# Altium PCB DAQ-1-A.PcbDoc (part 1 of 2)
Units mil, origin at the board's own origin, x right, y up, seen from the top; angles counter-clockwise.
Board outline 1653.54 x 4488.19 mil, 2 copper layers (Top Layer, Bottom Layer); 58 components, 45 nets, 204 pads, 105 vias.
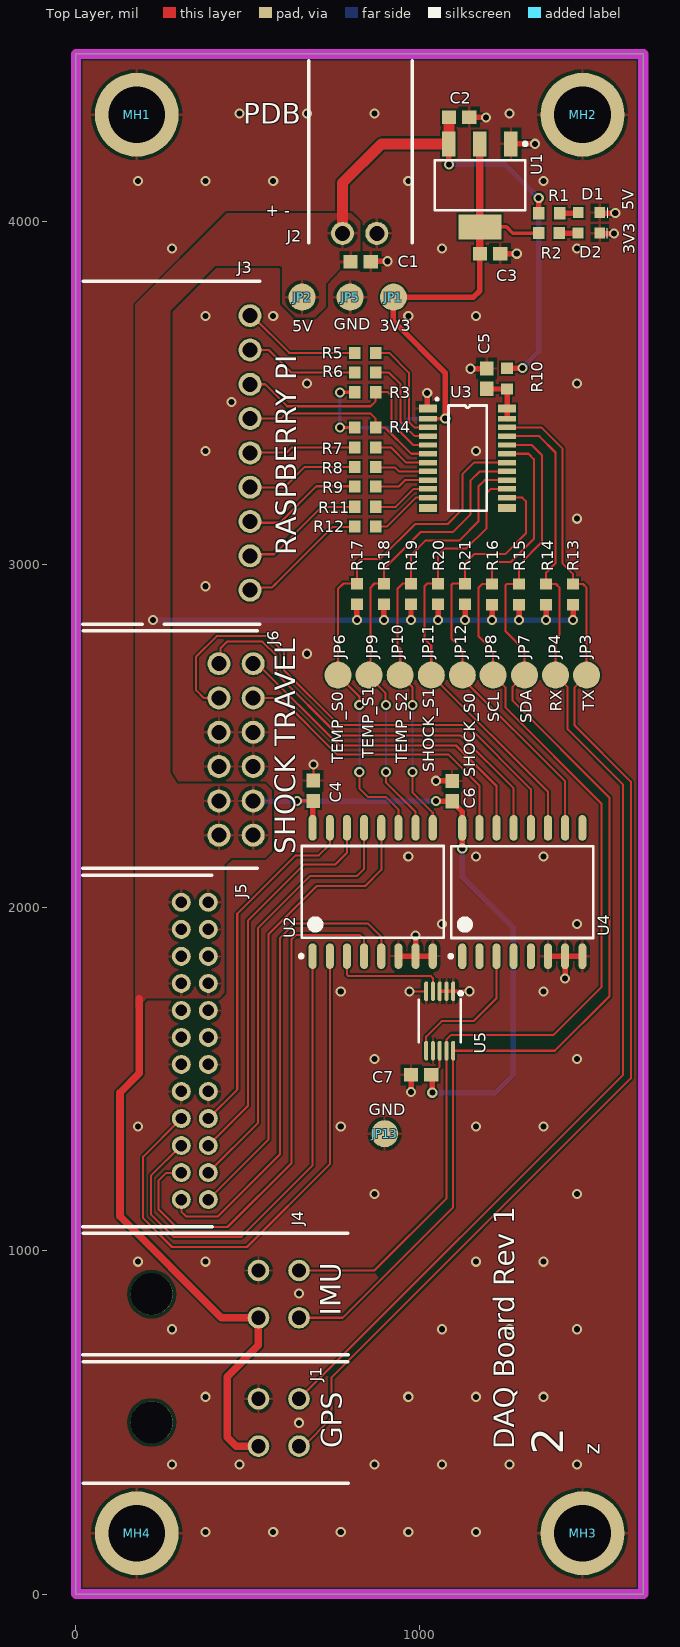
[diagram p0: Top Layer view]
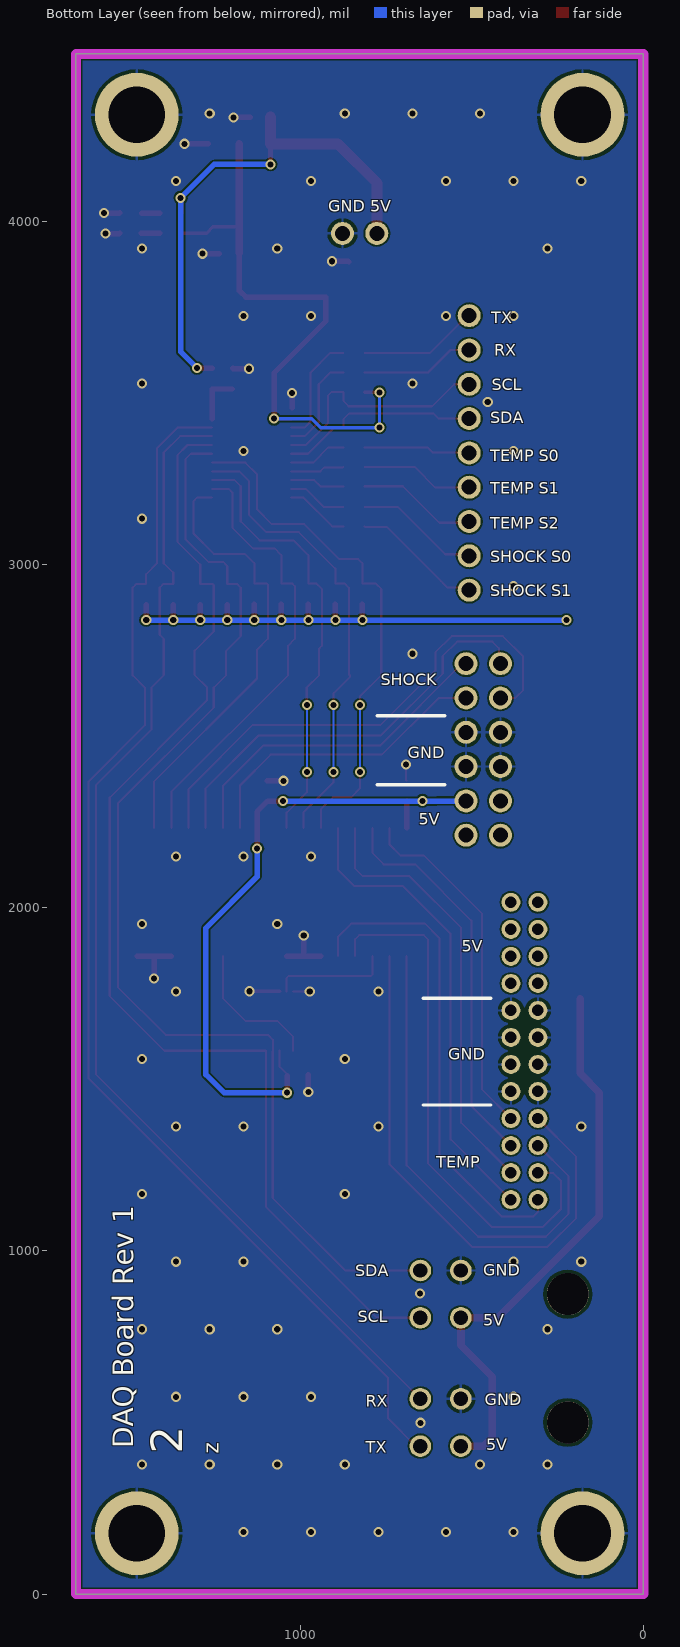
[diagram p1: Bottom Layer view, seen from below]
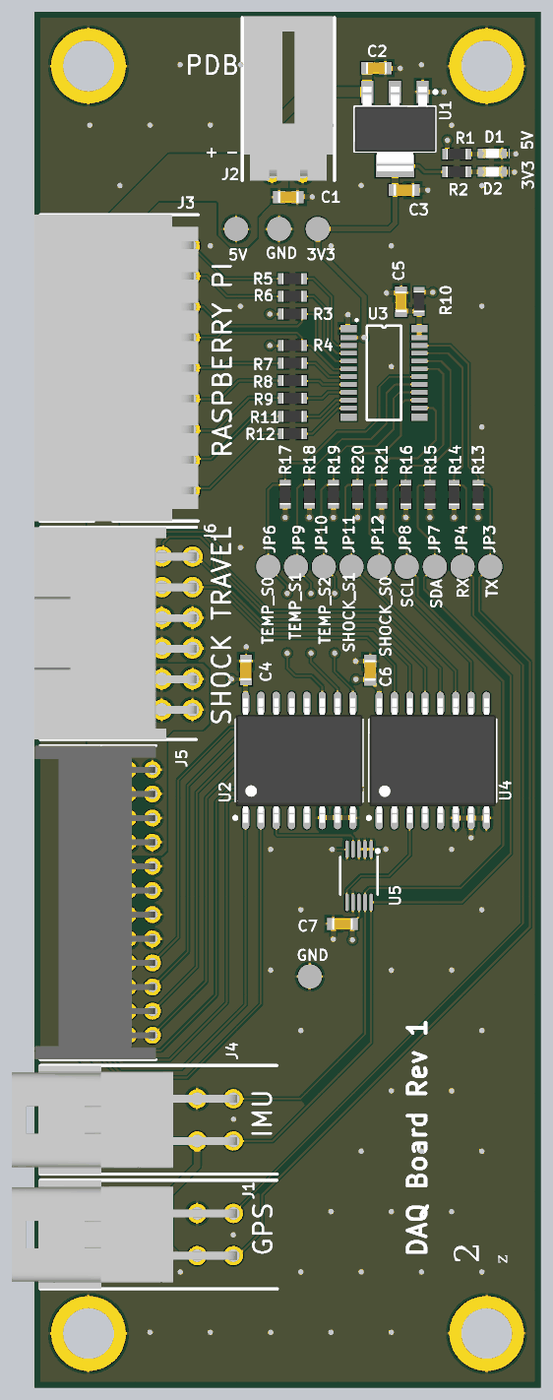
[diagram p2: 3D render of the assembled board from above, using the file's embedded part models]

## Layer stack, top to bottom
Top Solder: solder mask 0.4, Solder Resist, Dk 3.5
Top Layer: signal copper 1.4
Dielectric 1: dielectric 12.6, FR-4, Dk 4.8
Bottom Layer: signal copper 1.4
Bottom Solder: solder mask 0.4, Solder Resist, Dk 3.5

## Board outline
0,0 1653.54,0 1653.54,4488.19 0,4488.19

## Design rules (kind name [scope] priority, off if disabled: settings)
BoardOutlineClearance [All] p1: gap=7.87 ignorepadtopadclearanceinfootprint=FALSE
Clearance "Stitching HV_GND" [IsStitchingVia and InNet('HV_GND') vs (IsVia and (Not IsStitchingVia)) Or IsPad] p1: gap=5 ignorepadtopadclearanceinfootprint=FALSE
Clearance [All] p2: gap=5 ignorepadtopadclearanceinfootprint=FALSE except(7.87: Arc-SMDPad Track-SMDPad; 9.84: SMDPad-Hole THPad-Hole Via-Hole Fill-Hole Poly-Hole Region-Hole Text-Hole; 10: Arc-Via Arc-Hole Track-Via Track-Hole Via-Via; 12.99: Arc-THPad Track-THPad; 21.26: SMDPad-THPad THPad-THPad)
ComponentClearance [All] p1: gap=5 collisioncheckmode=3 verticalgap=5 showdistances=TRUE
DiffPairsRouting [All] p1: maxlimit=10 minlimit=5 mostfreqgap=5 toplayer_minwidth=5 toplayer_maxwidth=1000 toplayer_prefwidth=5 bottomlayer_minwidth=5 bottomlayer_maxwidth=1000 bottomlayer_prefwidth=5 maxuncoupledlength=500
Height [All] p1: minheight=0 maxheight=71497.94 prefheight=500
HoleSize [All] p1: absolutevalues=TRUE maxlimit=248.03 minlimit=11.81 maxpercent=80.000 minpercent=20.000
HoleToHoleClearance [All] p1: gap=9.84 allowstackedmicrovias=FALSE
MinimumAnnularRing [All] p1: minimumring=3
MinimumSolderMaskSliver [All] p1: minsoldermaskwidth=0
PlaneClearance [All] p1: clearance=5
PlaneConnect PlaneConnectPowerPads [InPadClass('PowerPads')] p1: planeconnectstyle=Direct reliefexpansion=20 reliefentries=4 reliefconductorwidth=10 reliefairgap=10
PlaneConnect [All] p2: pad.planeconnectstyle=Relief pad.reliefexpansion=11.81 pad.reliefentries=4 pad.reliefconductorwidth=10 pad.reliefairgap=5 via.planeconnectstyle=Direct via.reliefexpansion=11.81 via.reliefentries=4 via.reliefconductorwidth=5 via.reliefairgap=5
PolygonConnect PolygonConnectPowerPads [All vs (InPadClass('PowerPads'))] p1: connectstyle=Direct reliefconductorwidth=10 reliefentries=4 polygonreliefangle="90 Angle" airgapwidth=10
PolygonConnect [All] p2: thpad.connectstyle=Relief thpad.reliefconductorwidth=8 thpad.reliefentries=4 thpad.polygonreliefangle="90 Angle" thpad.airgapwidth=10 smdpad.connectstyle=Relief smdpad.reliefconductorwidth=8 smdpad.reliefentries=4 smdpad.polygonreliefangle="90 Angle" smdpad.airgapwidth=10 via.connectstyle=Direct via.reliefconductorwidth=8 via.reliefentries=4 via.polygonreliefangle="90 Angle" via.airgapwidth=10
RoutingVias [All] p1: holewidth=17.72 width=29.53 viastyle="Through Hole" minholewidth=11.81 minwidth=23.62 maxholewidth=23.62 maxwidth=259.84
SilkToSilkClearance [All] p1: silktosilkclearance=0
SilkToSolderMaskClearance [IsPad] p1: minsilkscreentomaskgap=0 clearancetoexposedcopper=TRUE
SolderMaskExpansion SolderMaskExpansion_Via [IsVia] p1: expansion=4 istentingtop=TRUE
SolderMaskExpansion [All] p2: expansion=2.95 istentingtop=FALSE
Width [All] p1: maxlimit=1000 minlimit=5.12 preferedwidth=6 minimp=50.000000 maximp=50.000000 favimp=50.000000
20 further rules are at their usual default settings.

## Classes and differential pairs
net class PWR: D+3.3V D+5V
net class RPI: NetJ3_1 NetJ3_2 NetJ3_5 NetJ3_6 NetJ3_7 NetJ3_8 NetJ3_9 RX_PI SCL_PI SDA_PI SHOCK_S0_PI SHOCK_S1_PI TEMP_S0_PI TEMP_S1_PI TEMP_S2_PI TX_PI

## Components (designator, comment, footprint, x,y, rotation, side; value= is the part's Value field where it differs from the comment)
C1 "1uF" CAP-0603 829.5,3883 r180 top
C2 "1uF" CAP-0603 1116.52,4304.26 r180 top
C3 "1uF" CAP-0603 1207.07,3906.49 r180 top
C4 "0.1uF" CAP-0603 691,2341 r270 top
C5 "0.1uF" CAP-0603 1196.85,3542.32 r270 top
C6 "0.1uF" CAP-0603 1096.22,2340.16 r270 top
C7 "0.1uF" CAP-0603 1006,1513 r0 top
D1 "Green" LED-0603 1542.39,4057.4 r180 top
D2 "Red" LED-0603 1542,3997.52 r180 top
J1 "WM11594-ND" 2X2PIN 531.89,568.9 r270 top
J2 "WM4153-ND" 2PIN 876.77,3965.35 r180 top
J3 "WM4907-ND" 9PIN 507.48,3725.59 r270 top
J4 "WM11594-ND" 2X2PIN 531.89,942.91 r270 top
J5 "H2875-ND" 2X12PIN 385.83,1149.61 r90 top
J6 "WM8263-ND" 2X6PIN 416.54,2711.42 r270 top
JP1 "Testpoint2" TP2#1 925.2,3779.53 r90 top
JP2 "Testpoint2" TP2#2 659,3783 r0 top
JP3 "Testpoint2" TP2#1 1488.19,2677.95 r0 top
JP4 "Testpoint2" TP2#1 1397.64,2677.95 r0 top
JP5 "Testpoint2" TP2#3 799,3775 r0 top
JP6 "Testpoint2" TP2#1 763.78,2677.95 r0 top
JP7 "Testpoint2" TP2#4 1307.48,2663.78 r0 top
JP8 "Testpoint2" TP2#5 1215.75,2677.17 r90 top
JP9 "Testpoint2" TP2#1 854.33,2677.95 r0 top
JP10 "Testpoint2" TP2#1 944.88,2677.95 r0 top
JP11 "Testpoint2" TP2#1 1035.43,2677.95 r90 top
JP12 "Testpoint2" TP2#1 1125.98,2677.95 r90 top
JP13 "Testpoint2" TP2#1 899.5,1341.5 r0 top
MH1 "MountingHole" MH4.2MM 177.17,4311.02 r0 top
MH2 "MountingHole" MH4.2MM 1476.38,4311.02 r0 top
MH3 "MountingHole" MH4.2MM 1476.38,177.17 r0 top
MH4 "MountingHole" MH4.2MM 177.17,177.17 r0 top
R1 "665R" RES-0603 1379.01,4023.94 r0 top
R2 "665R" RES-0603 1378.61,3966.02 r180 top
R3 "5K" RES-0603 843.01,3502.5 r180 top
R4 "5K" RES-0603 843.01,3399.63 r180 top
R5 "665R" RES-0603 842.99,3617 r180 top
R6 "665R" RES-0603 842.99,3559.91 r180 top
R7 "665R" RES-0603 843.31,3341.73 r180 top
R8 "665R" RES-0603 843.31,3284.65 r180 top
R9 "665R" RES-0603 843.31,3227.56 r180 top
R10 "200K" RES-0603 1255.91,3542.32 r90 top
R11 "665R" RES-0603 843.31,3168.5 r180 top
R12 "665R" RES-0603 843.31,3111.42 r180 top
R13 "5K" RES-0603 1448.82,2912.99 r270 top
R14 "5K" RES-0603 1370.08,2912.99 r90 top
R15 "5K" RES-0603 1291.34,2912.99 r90 top
R16 "5K" RES-0603 1212.6,2912.99 r90 top
R17 "5K" RES-0603 818.9,2914.37 r90 top
R18 "5K" RES-0603 897.64,2914.37 r90 top
R19 "5K" RES-0603 976.38,2914.37 r90 top
R20 "5K" RES-0603 1055.12,2914.37 r90 top
R21 "5K" RES-0603 1133.86,2914.37 r90 top
U1 "TC2117-3.3VDBTR" SOT223 1177.15,4105.31 r270 top
U2 "296-37427-1-ND" 16-SOIC 864.8,2046.06 r90 top
U3 "NVT2010PW,118" TSSOP65P660X110-24 1141.34,3310.24 r0 top
U4 "296-37427-1-ND" 16-SOIC 1300.63,2045.67 r90 top
U5 "ADS1115IDGSR" VSSOP50P310X310-10P 1059.93,1669.97 r270 top

## Footprints (in the part's own frame and the unit in brackets; to place one, negate y for a bottom-side part, rotate by r counter-clockwise, add the part's x,y. Pads: shape width x height; smd on the part's side, far side on the other; paste and mask are expansions set on the pad)
2PIN [mm]
  round 1.7 hole 1.11: 1(0,0) 2(2.54,0)
  body extent -2.48,-12.89 4.88,0.7, height 7.06
2X2PIN [mm]
  round 1.6 hole 1.06: 1(0,0) 2(3.5,0) 3(3.5,3) 4(0,3)
  round 3.1 hole 3.1: 5(1.75,-7.91)
  body extent -2.75,-15.37 6.25,3.3, height 13.78
2X6PIN [mm]
  round 1.7 hole 1.11: 1(0,0) 2(2.54,0) 3(5.08,0) 4(7.62,0) 5(10.16,0) 6(12.7,0) 7(12.7,2.54) 8(10.16,2.54) 9(7.62,2.54) 10(5.08,2.54) 11(2.54,2.54) 12(0,2.54)
  body extent -2.42,-10.55 15.16,2.85, height 9.87
2X12PIN [mm]
  round 1.4 hole 0.85: 1(0,0) 2(2,0) 3(4,0) 4(6,0) 5(8,0) 6(10,0) 7(12,0) 8(14,0) 9(16,0) 10(18,0) 11(20,0) 12(22,0) 13(22,2) 14(20,2) 15(18,2) 16(16,2) 17(14,2) 18(12,2) 19(10,2) 20(8,2) 21(6,2) 22(4,2) 23(2,2) 24(0,2)
  body extent -2,-0.27 24,9.73, height 5.66
9PIN [mm]
  round 1.7 hole 1.11: 1(0,0) 2(2.54,0) 3(5.08,0) 4(7.62,0) 5(10.16,0) 6(12.7,0) 7(15.24,0) 8(17.78,0) 9(20.32,0)
  body extent -2.56,-12.89 22.84,0.7, height 7.06
16-SOIC [mm] "SOIC, 16-Leads, Body 10.30x7.50mm, Pitch 1.27mm, IPC Medium Density"
  oval 1.9x0.6 smd: 1(-4.75,4.445) 2(-4.75,3.175) 3(-4.75,1.905) 4(-4.75,0.635) 5(-4.75,-0.635) 6(-4.75,-1.905) 7(-4.75,-3.175) 8(-4.75,-4.445) 9(4.75,-4.445) 10(4.75,-3.175) 11(4.75,-1.905) 12(4.75,-0.635) 13(4.75,0.635) 14(4.75,1.905) 15(4.75,3.175) 16(4.75,4.445)
  silkscreen extent -4.87,-5.25 3.4,5.42, body extent -5.15,-5.25 5.15,5.25, height 2.65
CAP-0603 [mm] "Chip Capacitor, 2-Leads, Body 1.60x0.80mm, IPC Medium Density"
  rect 1.05x1 smd: 1(-0.75,0) 2(0.75,0)
  body extent -0.87,-0.48 0.87,0.48, height 0.9
LED-0603 [mm]
  rect 0.8x0.8 smd: 1(2,0.8) 2(0.4,0.8)
  silkscreen extent -0.18,0.43 -0.18,1.17, body extent 0.4,0.4 2,1.2, height 0.7
MH4.2MM [mm] "Mounting Hole, 4.2mm"
  round 6.2 hole 4.2: 1(0,0)
RES-0603 [mm] "Chip Resistor, 2-Leads, Body 1.60x0.80mm, IPC Medium Density"
  rect 0.85x0.9 smd: 1(-0.775,0) 2(0.775,0)
  body extent -0.85,-0.45 0.85,0.45, height 0.55
SOT223 [mm] "SOT223, 4-Leads, Body 6.50x7.00mm (avg), Pitch 2.30mm, IPC Medium Density"
  rect 1.85x1 smd: 1(-3.075,-2.3) 2(-3.075,2.3) 3(-3.075,0)
  rect 1.85x3.2 smd: 3(3.075,0)
  silkscreen extent -3.2,-3.35 1.85,3.48, body extent -3.5,-3.35 3.5,3.35, height 1.8
TP2#1 [mm]
  round 2 smd: 1(0,0)
TP2#2 [mm]
  round 2 smd: 1(0,-0.088)
TP2#3 [mm]
  round 2 smd: 1(0,0.115)
TP2#4 [mm]
  round 2 smd: 1(0,0.36)
TP2#5 [mm]
  round 2 smd: 1(0.02,0)
TSSOP65P660X110-24 [mm] "TSSOP, 24-Leads, Body 7.9x4.50mm, Pitch 0.65mm, IPC Medium Density"
  rect 1.35x0.6 smd: 1(-2.925,3.675) 12(-2.925,-3.675) 13(2.925,-3.675) 24(2.925,3.675)
  rect 1.35x0.4 smd: 2(-2.925,2.925) 3(-2.925,2.275) 4(-2.925,1.625) 5(-2.925,0.975) 6(-2.925,0.325) 7(-2.925,-0.325) 8(-2.925,-0.975) 9(-2.925,-1.625) 10(-2.925,-2.275) 11(-2.925,-2.925) 14(2.925,-2.925) 15(2.925,-2.275) 16(2.925,-1.625) 17(2.925,-0.975) 18(2.925,-0.325) 19(2.925,0.325) 20(2.925,0.975) 21(2.925,1.625) 22(2.925,2.275) 23(2.925,2.925)
  silkscreen extent -2.34,-3.9 1.42,4.45, body extent -2.25,-3.95 2.25,3.95, height 1.1
VSSOP50P310X310-10P [mm] "VSSOP, 10-Leads, Body 3.1x3.1mm (max), Pitch 0.50mm, IPC Low Density"
  oval 1.45x0.3 smd: 1(-2.2,1) 2(-2.2,0.5) 3(-2.2,0) 4(-2.2,-0.5) 5(-2.2,-1) 6(2.2,-1) 7(2.2,-0.5) 8(2.2,0) 9(2.2,0.5) 10(2.2,1)
  silkscreen extent -2.17,-1.55 1.55,1.68, body extent -1.55,-1.55 1.55,1.55, height 1.1

## Part data
C1 C2 C3: library part 0603-1uF-16V, "CAP CER 1UF 16V X7R 0603", Case Code (Imperial)=0603, Case Code (Metric)=1608, Dielectric=X7R, Dielectric Material=Ceramic, Manufacturer=KEMET, Manufacturer Part Number=C0603C105K4RACTU, Max Operating Temperature=125°C, Min Operating Temperature=-55°C, Package Quantity=4000, Supplier Part Number 1=399-7847-6-ND, Tolerance=10%, Voltage=16V, Capacitance=1uF, Case/Package=0603, ComponentLink1Description=http://www.mouser.com/ds/2/212/KEM_C1002_X7R_SMD-1102033.pdf?src-supplier=Mouser, ComponentLink1URL=http://www.mouser.com/ds/2/212/KEM_C1002_X7R_SMD-1102033.pdf?src-supplier=Mouser, ComponentLink2Description=http://www.kemet.com/kemet/web/homepage/kechome.nsf/file/Commercial%20Ceramic%20Chips%20X7R%20Dielectric/$file/KEM_C1002_X7R_SMD.pdf?src-supplier=Element14, ComponentLink2URL=http://www.kemet.com/kemet/web/homepage/kechome.nsf/file/Commercial%20Ceramic%20Chips%20X7R%20Dielectric/$file/KEM_C1002_X7R_SMD.pdf?src-supplier=Element14, ComponentLink3Description=https://www.verical.com/server-webapp/html/getDatasheet?partID=385479&src-supplier=Verical, ComponentLink3URL=https://www.verical.com/server-webapp/html/getDatasheet?partID=385479&src-supplier=Verical, ComponentLink4Description=http://www.kemet.com/kemet/web/homepage/kechome.nsf/vapubfiles/KEM_C1002_X7R_SMD.pdf/$file/KEM_C1002_X7R_SMD.pdf?src-supplier=Element14, ComponentLink4URL=http://www.kemet.com/kemet/web/homepage/kechome.nsf/vapubfiles/KEM_C1002_X7R_SMD.pdf/$file/KEM_C1002_X7R_SMD.pdf?src-supplier=Element14, Contact Plating=Tin,Matte, Depth=0.8mm, Dissipation Factor=3.5%, Height=0.8mm, Length=1.6mm, Mount="Surface Mount,PCB", Number of Pins=2, Packaging="Tape and Reel", Pricing 1="1=0.12, 10=0.088, 100=0.0391, 500=0.02792, 1000=0.02193 (USD)", Radiation Hardening=No, REACH SVHC="No SVHC", Stock 1=600463, Supplier 1=Digi-Key, Termination=SMD/SMT, Thickness=0.034inch, Voltage Rating=16V, Voltage Rating (DC)=16V, Width=0.031inch
C4 C5 C6 C7: library part 0603-0.1uF-16V, "CAP CER 0.1UF 16V X7R 0603", Capacitance=100nF, Case Code (Imperial)=0603, Case Code (Metric)=1608, Dielectric=X7R, Dielectric Material=Ceramic, Manufacturer=KEMET, Manufacturer Part Number=C0603C104M4RACTU, Max Operating Temperature=125°C, Min Operating Temperature=-55°C, Package Quantity=1, Supplier Part Number 1=399-1099-6-ND, Tolerance=20%, Voltage Rating=16V, Case/Package=0603, ComponentLink1Description=https://www.verical.com/server-webapp/html/getDatasheet?partID=66190&src-supplier=Verical, ComponentLink1URL=https://www.verical.com/server-webapp/html/getDatasheet?partID=66190&src-supplier=Verical, ComponentLink2Description=http://www.farnell.com/datasheets/2746055.pdf?src-supplier=Element14, ComponentLink2URL=http://www.farnell.com/datasheets/2746055.pdf?src-supplier=Element14, ComponentLink3Description=http://www.farnell.com/datasheets/2123765.pdf?src-supplier=Element14, ComponentLink3URL=http://www.farnell.com/datasheets/2123765.pdf?src-supplier=Element14, ComponentLink4Description=http://www.alliedelec.com/m/d/9bfe7773041ffe9d406e68bc7b377fdd.pdf?src-supplier=Allied+Electronics, ComponentLink4URL=http://www.alliedelec.com/m/d/9bfe7773041ffe9d406e68bc7b377fdd.pdf?src-supplier=Allied+Electronics, ComponentLink5Description=https://www.verical.com/server-webapp/html/getDatasheet?partID=302288&src-supplier=Verical, ComponentLink5URL=https://www.verical.com/server-webapp/html/getDatasheet?partID=302288&src-supplier=Verical, Depth=0.8mm, Height=0.8mm, Lead Pitch=0.7mm, Length=1.6mm, Mount="Surface Mount,PCB", Number of Pins=2, Packaging="Tape and Reel", Pricing 1="1=0.1, 10=0.036, 100=0.0161, 500=0.01152, 1000=0.00904 (USD)", Radiation Hardening=No, REACH SVHC="No SVHC", Stock 1=254524, Supplier 1=Digi-Key, Termination=SMD/SMT, Thickness=0.034inch, Voltage Rating (DC)=16V, Width=0.031inch
D1: library part LED-Green, "LED GREEN CLEAR 0603 SMD", Case Code (Imperial)=0603, Case Code (Metric)=1608, Forward Current=30mA, Forward Voltage=2V, Manufacturer="Wurth Electronics", Manufacturer Part Number=150060VS75000, Max Operating Temperature=85°C, Min Operating Temperature=-40°C, Package Quantity=1, Supplier Part Number 1=732-4980-1-ND, Test Current=20mA, Case/Package=0603, Color=Green, ComponentLink1Description=https://katalog.we-online.de/led/datasheet/150060VS75000.pdf?src-supplier=Digi-Key, ComponentLink1URL=https://katalog.we-online.de/led/datasheet/150060VS75000.pdf?src-supplier=Digi-Key, Dominant Wavelength=570nm, Height=0.7mm, Length=1.6mm, Lens Style=Clear,Rectangular, Luminous Intensity=40mcd, Mount="Surface Mount", Number of Pins=2, Packaging="Tape and Reel", Pricing 1="1=0.14, 50=0.133, 100=0.114, 500=0.099 (USD)", REACH SVHC=Unknown, Stock 1=118118, Supplier 1=Digi-Key, Viewing Angle=140°, Wavelength=570nm, Width=0.8mm
D2: library part LED-Red, "LED RED CLEAR 0603 SMD", Case Code (Imperial)=0603, Case Code (Metric)=1608, Forward Current=30mA, Forward Voltage=2V, Manufacturer="Wurth Electronics", Manufacturer Part Number=150060RS75000, Max Operating Temperature=85°C, Min Operating Temperature=-40°C, Package Quantity=1, Supplier Part Number 1=732-4978-6-ND, Test Current=20mA, Case/Package=0603, Color=Red, ComponentLink1Description=https://katalog.we-online.de/led/datasheet/150060RS75000.pdf?src-supplier=Digi-Key, ComponentLink1URL=https://katalog.we-online.de/led/datasheet/150060RS75000.pdf?src-supplier=Digi-Key, ComponentLink2Description=http://www.produktinfo.conrad.com/datenblaetter/750000-774999/759428-da-01-en-CHIPLED_0603_W_KL_ROT_150060RS75000.pdf?src-supplier=Conrad, ComponentLink2URL=http://www.produktinfo.conrad.com/datenblaetter/750000-774999/759428-da-01-en-CHIPLED_0603_W_KL_ROT_150060RS75000.pdf?src-supplier=Conrad, Dominant Wavelength=625nm, Height=0.7mm, Length=1.6mm, Lens Style=Clear,Rectangular, Luminous Intensity=250mcd, Mount="Surface Mount", Packaging="Cut Tape", Pricing 1="1=0.14, 50=0.133, 100=0.114, 500=0.099 (USD)", REACH SVHC=Unknown, Stock 1=18518, Supplier 1=Digi-Key, Viewing Angle=140°, Wavelength=625nm, Width=0.8mm
J1 J4: library part 2X2PIN, "CONN HEADER R/A 4POS 3.5MM", Color=Black, Manufacturer=Molex, Manufacturer Part Number=172316-1104, ComponentLink1Description=http://www.alliedelec.com/images/products/datasheets/bm/MOLEX/70617684.pdf?src-supplier=Allied+Electronics, ComponentLink1URL=http://www.alliedelec.com/images/products/datasheets/bm/MOLEX/70617684.pdf?src-supplier=Allied+Electronics, ComponentLink2Description=http://www.farnell.com/datasheets/1944206.pdf?src-supplier=Element14, ComponentLink2URL=http://www.farnell.com/datasheets/1944206.pdf?src-supplier=Element14, ComponentLink3Description=http://www.farnell.com/datasheets/2214524.pdf?src-supplier=Farnell, ComponentLink3URL=http://www.farnell.com/datasheets/2214524.pdf?src-supplier=Farnell, ComponentLink4Description=https://www.molex.com/pdm_docs/sd/1723161104_sd.pdf?src-supplier=Digi-Key, ComponentLink4URL=https://www.molex.com/pdm_docs/sd/1723161104_sd.pdf?src-supplier=Digi-Key, ComponentLink5Description=http://www.farnell.com/datasheets/1955765.pdf?src-supplier=Element14, ComponentLink5URL=http://www.farnell.com/datasheets/1955765.pdf?src-supplier=Element14, Connector Type="Male Pin", Contact Material="Copper Alloy", Contact Plating=Tin, Fastening Type=Latch, Gender=Male, Mount="Through Hole", Number of Circuits=4, Number of Contacts=4, Number of Pins=4, Number of Positions=4, Number of Rows=2, Packaging=Tray, Pitch=0.138inch, Pricing 1="1=0.93, 10=0.814, 100=0.7027, 500=0.57492, 1000=0.51104, 5000=0.44716, 10000=0.4248 (USD)", REACH SVHC=Unknown, Row Spacing=0.181inch, Stock 1=4392, Supplier 1=Digi-Key, Supplier Part Number 1=WM11594-ND, Termination=Solder
J2: library part 2PIN, "CONN HEADER R/A 2POS 2.54MM", Color=Black, Contact Resistance=30mR, Manufacturer=Molex, Manufacturer Part Number=0705530106, Max Operating Temperature=105°C, Min Operating Temperature=-40°C, ComponentLink1Description=http://www.molex.com/webdocs/datasheets/pdf/en-us/0705530106_PCB_HEADERS.pdf?src-supplier=Avnet+Asia, ComponentLink1URL=http://www.molex.com/webdocs/datasheets/pdf/en-us/0705530106_PCB_HEADERS.pdf?src-supplier=Avnet+Asia, ComponentLink2Description=https://www.molex.com/pdm_docs/ps/PS-70400.pdf?src-supplier=Digi-Key, ComponentLink2URL=https://www.molex.com/pdm_docs/ps/PS-70400.pdf?src-supplier=Digi-Key, Connector Type="Male Pin", Contact Material=Bronze, Contact Mating Length=0.24inch, Contact Plating=Gold, Depth=13.59mm, Housing Color=Black, Housing Material=Polyester, Length=7.37mm, Mount="Through Hole", Number of Contacts=2, Number of Positions=2, Number of Rows=1, Orientation="Right Angle", Packaging=Rail/Tube, Pitch=2.54mm, Pricing 1="1=1.38, 10=1.25, 100=1.071, 500=0.8925, 1000=0.765, 5000=0.6783, 10000=0.663 (USD)", Stock 1=2224, Supplier 1=Digi-Key, Supplier Part Number 1=WM4153-ND, Termination=Solder
J3: library part 9PIN, "CONN HEADER R/A 9POS 2.54MM", Color=Black, Contact Resistance=30mR, Current Rating=3A, Flammability Rating="UL94 V-0", Insulation Resistance=1GR, Manufacturer=Molex, Manufacturer Part Number=70553-0112, Max Operating Temperature=105°C, Min Operating Temperature=-40°C, Package Quantity=1, Supplier Part Number 1=23-0705530112-ND, Voltage Rating=250V, ComponentLink1Description=https://www.molex.com/pdm_docs/ps/PS-70400.pdf?src-supplier=Digi-Key, ComponentLink1URL=https://www.molex.com/pdm_docs/ps/PS-70400.pdf?src-supplier=Digi-Key, ComponentLink2Description=http://www.mouser.com/ds/2/276/0705530112_PCB_HEADERS-172840.pdf?src-supplier=Mouser, ComponentLink2URL=http://www.mouser.com/ds/2/276/0705530112_PCB_HEADERS-172840.pdf?src-supplier=Mouser, Connector Type="Male Pin", Contact Material=Bronze, Contact Mating Length=0.24inch, Contact Plating=Gold, ELV=Compliant, Glow Wire Compliant=Non-compliant, Housing Material=Thermoplastic, Material=Brass, Mount="Through Hole", Number of Circuits=8, Number of Contacts=8, Number of Positions=8, Number of Rows=1, Orientation="Right Angle", Packaging=Rail/Tube, Pitch=2.54mm, Pricing 1="1=2.43, 10=2.205, 100=1.89, 500=1.575, 1000=1.35, 5000=1.197, 10000=1.17 (USD)", Stock 1=1363, Supplier 1=Digi-Key, Termination=Solder, Voltage Rating (DC)=250V
J5: library part 2X12PIN, "CONN HEADER R/A 24POS 2MM", ComponentLink1Description=http://docs-usa.electrocomponents.com/techlib:/itc_doclist_US.htm?stockno=6888963&src-supplier=Allied+Electronics, ComponentLink1URL=http://docs-usa.electrocomponents.com/techlib:/itc_doclist_US.htm?stockno=6888963&src-supplier=Allied+Electronics, ComponentLink2Description=https://www.verical.com/server-webapp/html/getDatasheet?partID=456315&src-supplier=Verical, ComponentLink2URL=https://www.verical.com/server-webapp/html/getDatasheet?partID=456315&src-supplier=Verical, ComponentLink3Description=http://www.hirose.co.jp/cataloge_hp/en_DF11_20130411.pdf?src-supplier=Future+Electronics, ComponentLink3URL=http://www.hirose.co.jp/cataloge_hp/en_DF11_20130411.pdf?src-supplier=Future+Electronics, ComponentLink4Description=http://www.farnell.com/datasheets/91550.pdf?src-supplier=Element14, ComponentLink4URL=http://www.farnell.com/datasheets/91550.pdf?src-supplier=Element14, ComponentLink5Description=http://www.mouser.com/ds/2/185/DF11_catalog-1064296.pdf?src-supplier=Mouser, ComponentLink5URL=http://www.mouser.com/ds/2/185/DF11_catalog-1064296.pdf?src-supplier=Mouser, ComponentLink6Description=http://documents.rs-components.com/techlib://itc_doclist_GB.htm?stockno=6056598&src-supplier=RSComponents, ComponentLink6URL=http://documents.rs-components.com/techlib://itc_doclist_GB.htm?stockno=6056598&src-supplier=RSComponents, Supplier 1=Digi-Key, Supplier Part Number 1=H2875-ND
J6: library part 2X6PIN, "CONN HEADER R/A 12POS 2.54MM", Color=Black, Current Rating=3A, Flammability Rating="UL94 V-0", Manufacturer=Molex, Manufacturer Part Number=90130-3110, Max Operating Temperature=125°C, Max Voltage Rating (AC)=350V, Max Voltage Rating (DC)=350.35kV, Min Operating Temperature=-55°C, Package Quantity=1, ComponentLink1Description=http://www.mouser.com/ds/2/276/0901303110_PCB_HEADERS-151522.pdf?src-supplier=Mouser, ComponentLink1URL=http://www.mouser.com/ds/2/276/0901303110_PCB_HEADERS-151522.pdf?src-supplier=Mouser, ComponentLink2Description=http://uk.rs-online.com/webdocs/13c4/0900766b813c4c8e.pdf?src-supplier=RSComponents, ComponentLink2URL=http://uk.rs-online.com/webdocs/13c4/0900766b813c4c8e.pdf?src-supplier=RSComponents, ComponentLink3Description=http://www.molex.com/webdocs/datasheets/pdf/en-us/0901303110_PCB_HEADERS.pdf?src-supplier=Avnet, ComponentLink3URL=http://www.molex.com/webdocs/datasheets/pdf/en-us/0901303110_PCB_HEADERS.pdf?src-supplier=Avnet, ComponentLink4Description=http://www.molex.com/pdm_docs/sd/901303110_sd.pdf?src-supplier=Digi-Key, ComponentLink4URL=http://www.molex.com/pdm_docs/sd/901303110_sd.pdf?src-supplier=Digi-Key, ComponentLink5Description=http://www.molex.com/webdocs/datasheets/pdf/en-us/0901303110_PCB_HEADERS.pdf?src-supplier=Avnet+Europe, ComponentLink5URL=http://www.molex.com/webdocs/datasheets/pdf/en-us/0901303110_PCB_HEADERS.pdf?src-supplier=Avnet+Europe, Connector Type="Male Pin", Contact Material=Brass, Contact Mating Length=0.266inch, Contact Plating=Tin,Lead, Depth=9.75mm, Gender=Male, Glow Wire Compliant=Non-compliant, Housing Color=Black, Housing Material=Polyester, Lead Free="Lead Free", Length=15.42mm, Mount="Through Hole", Number of Circuits=10, Number of Contacts=10, Number of Positions=10, Number of Rows=2, Orientation="Right Angle", Packaging=Tray, Pitch=2.54mm, Pricing 1="1=1.47, 10=1.329, 100=1.1395, 500=0.94956, 1000=0.8139, 5000=0.72166, 10000=0.70538 (USD)", Radiation Hardening=No, REACH SVHC="No SVHC", Row Spacing=0.1inch, Stock 1=3596, Supplier 1=Digi-Key, Supplier Part Number 1=WM8263-ND, Termination=Solder, Voltage Rating=350V, Voltage Rating (DC)=350V
JP1 JP2 JP3 JP4 JP5 JP6 JP7 JP8 JP9 JP10 JP11 JP12 JP13: "Single layer pad TP"
MH1 MH2 MH3 MH4: library part MH4.2mm, "Mounting hole, 4.2mm", Case=TH
R1 R2 R5 R6 R7 R8 R9 R11 R12: library part 0603-665R, "RES SMD 665 OHM 1% 1/10W 0603", Case Code (Imperial)=0603, Case Code (Metric)=1608, Manufacturer=Yageo, Manufacturer Part Number=RC0603FR-07665RL, Max Operating Temperature=155°C, Max Power Dissipation=100mW, Min Operating Temperature=-55°C, Package Quantity=1, Supplier Part Number 1=311-665HRDKR-ND, Temperature Coefficient=100ppm/°C, Tolerance=1%, Voltage Rating=75V, Voltage Rating (DC)=50V, Case/Package=0603, ComponentLink1Description=http://www.yageo.com/documents/recent/PYu-RC_Group_51_RoHS_L_9.pdf?src-supplier=Digi-Key, ComponentLink1URL=http://www.yageo.com/documents/recent/PYu-RC_Group_51_RoHS_L_9.pdf?src-supplier=Digi-Key, ComponentLink2Description=http://www.yageo.com/documents/recent/PYu-RC0603_51_RoHS_L_4.pdf?src-supplier=Avnet, ComponentLink2URL=http://www.yageo.com/documents/recent/PYu-RC0603_51_RoHS_L_4.pdf?src-supplier=Avnet, ComponentLink3Description=http://www.yageo.com/documents/recent/PYu-RC_Group_51_RoHS_L_10.pdf?src-supplier=Digi-Key, ComponentLink3URL=http://www.yageo.com/documents/recent/PYu-RC_Group_51_RoHS_L_10.pdf?src-supplier=Digi-Key, ComponentLink4Description=http://www.yageo.com/documents/recent/PYu-RC0603_51_RoHS_L_4.pdf?src-supplier=Avnet+Europe, ComponentLink4URL=http://www.yageo.com/documents/recent/PYu-RC0603_51_RoHS_L_4.pdf?src-supplier=Avnet+Europe, Composition="Thick Film", Contact Plating=Tin,Matte, Depth=0.8mm, Features="Moisture Resistant", Height=0.022inch, Lead Free="Lead Free", Length=1.6mm, Military Standard=Not, Number of Terminations=2, Packaging="Tape and Reel", Power Rating=100mW, Pricing 1="1=0.1, 10=0.023, 100=0.0094, 1000=0.00421, 2500=0.00366 (USD)", Resistance=665R, Stock 1=143871, Supplier 1=Digi-Key, Termination=SMD/SMT, Weight=7.1E-05oz, Width=0.8mm
R3 R4 R13 R14 R15 R16 R17 R18 R19 R20 R21: library part 0603-5KR, "RES SMD 4.99K OHM 1% 1/10W 0603", Case Code (Imperial)=0603, Case Code (Metric)=1608, Manufacturer=Bourns, Manufacturer Part Number=CR0603-FX-4991ELF, Max Operating Temperature=155°C, Max Power Dissipation=100mW, Min Operating Temperature=-55°C, Package Quantity=1, Resistance=4.99kR, Supplier Part Number 1=CR0603-FX-4991ELFDKR-ND, Temperature Coefficient=100ppm/°C, Tolerance=1%, Voltage Rating=50V, Case/Package=0603, ComponentLink1Description=https://www.bourns.com/docs/Product-Datasheets/CHPREZTR.pdf?src-supplier=Digi-Key, ComponentLink1URL=https://www.bourns.com/docs/Product-Datasheets/CHPREZTR.pdf?src-supplier=Digi-Key, ComponentLink2Description=http://www.bourns.com/pdfs/chpreztr.pdf?src-supplier=Avnet, ComponentLink2URL=http://www.bourns.com/pdfs/chpreztr.pdf?src-supplier=Avnet, Composition="Thick Film", Contact Plating=Tin, Features="Moisture Resistant", Height=0.022inch, Length=0.063inch, Mount="Surface Mount", Number of Terminations=2, Packaging="Tape and Reel", Power Rating=100mW, Pricing 1="1=0.1, 10=0.02, 25=0.0144, 50=0.011, 100=0.0082, 250=0.00624, 500=0.00498, 1000=0.00367 (USD)", Radiation Hardening=No, Stock 1=70557, Supplier 1=Digi-Key, Termination=SMD/SMT, Thickness=457um, Width=0.8mm
R10: library part 0603-200KR, "RES SMD 200K OHM 1% 1/10W 0603", Case/Package=0603, Manufacturer="Yageo Phycomp", Manufacturer Part Number=RC0603FR-072K2L, Max Operating Temperature=155°C, Min Operating Temperature=-55°C, Power Rating=100mW, Resistance=2.2kR, Supplier Part Number 1=311-2.20KHRDKR-ND, Temperature Coefficient=100ppm/°C, Tolerance=1%, Voltage Rating (DC)=50V, Depth=0.8mm, Height=0.45mm, Lead Free="Lead Free", Length=1.6mm, Mount="Surface Mount", Number of Pins=2, Packaging="Cut Tape", Pricing 1="1=0.1, 10=0.023, 100=0.0094, 1000=0.00421, 2500=0.00366 (USD)", REACH SVHC="No SVHC", Stock 1=8205077, Supplier 1=Digi-Key, Width=800um
U1: library part LDO-3.3V-800mA, "IC REG LIN 3.3V 800MA SOT223-3", Case/Package=SOT-223-3, Dropout Voltage=1.2V, Manufacturer=Microchip, Max Input Voltage=6V, Max Operating Temperature=125°C, Max Output Current=800mA, Max Output Voltage=3.3V, Min Input Voltage=2.7V, Min Operating Temperature=-40°C, Package Quantity=4000, Quiescent Current=80uA, Supplier Part Number 1=TC2117-3.3VDBDKR-ND, Accuracy=0.5%, ComponentLink1Description=http://www.farnell.com/datasheets/1669439.pdf?src-supplier=Element14, ComponentLink1URL=http://www.farnell.com/datasheets/1669439.pdf?src-supplier=Element14, ComponentLink2Description=http://ww1.microchip.com/downloads/en/DeviceDoc/21665D.pdf?src-supplier=Avnet+Europe, ComponentLink2URL=http://ww1.microchip.com/downloads/en/DeviceDoc/21665D.pdf?src-supplier=Avnet+Europe, ComponentLink3Description=http://www.microchip.com/mymicrochip/filehandler.aspx?ddocname=en023833&src-supplier=Digi-Key, ComponentLink3URL=http://www.microchip.com/mymicrochip/filehandler.aspx?ddocname=en023833&src-supplier=Digi-Key, ComponentLink4Description=http://ww1.microchip.com/downloads/en/DeviceDoc/21665D.pdf?src-supplier=Future+Electronics, ComponentLink4URL=http://ww1.microchip.com/downloads/en/DeviceDoc/21665D.pdf?src-supplier=Future+Electronics, ComponentLink5Description=http://ww1.microchip.com/downloads/en/DeviceDoc/21665D.pdf?src-supplier=Avnet, ComponentLink5URL=http://ww1.microchip.com/downloads/en/DeviceDoc/21665D.pdf?src-supplier=Avnet, ComponentLink6Description=http://www.farnell.com/datasheets/1669439.pdf?src-supplier=Newark, ComponentLink6URL=http://www.farnell.com/datasheets/1669439.pdf?src-supplier=Newark, Height=1.7mm, Lead Free="Lead Free", Length=6.7mm, Manufacturer Part Number=TC2117-3.3VDBTR, Max Supply Voltage=6V, Min Output Voltage=3.3V, Min Supply Voltage=2.7V, Mount="Surface Mount", Nominal Output Voltage=3.3V, Number of Outputs=1, Number of Pins=3, Number of Regulators=1, Output Current=800mA, Output Type=Fixed, Output Voltage=3.3V, Packaging="Tape and Reel", Polarity=Positive, Pricing 1="1=0.73, 25=0.61, 100=0.55 (USD)", Radiation Hardening=No, REACH SVHC="No SVHC", Stock 1=3126, Supplier 1=Digi-Key, Termination=SMD/SMT, Width=3.7mm
U2 U4: library part MUX-SN74LV4051ATDWRQ1, "IC MUX/DEMUX 8X1 16SOIC", Case/Package=SOIC, Manufacturer="Texas Instruments", Manufacturer Part Number=SN74LV4051ATDWRQ1, Max Operating Temperature=105°C, Max Supply Voltage=5.5V, Min Operating Temperature=-40°C, Min Supply Voltage=2V, On-State Resistance=75R, Operating Supply Current=20uA, Package Quantity=2000, Supplier Part Number 1=296-37427-6-ND, -3db Bandwidth=35MHz, Bandwidth=35MHz, ComponentLink1Description=https://www.verical.com/server-webapp/html/getDatasheet?partID=348177&src-supplier=Verical, ComponentLink1URL=https://www.verical.com/server-webapp/html/getDatasheet?partID=348177&src-supplier=Verical, ComponentLink2Description=http://focus.ti.com/lit/ds/symlink/sn74lv4051a-q1.pdf?src-supplier=Avnet, ComponentLink2URL=http://focus.ti.com/lit/ds/symlink/sn74lv4051a-q1.pdf?src-supplier=Avnet, ComponentLink3Description=http://www.ti.com/lit/ds/symlink/sn74lv4051a-q1.pdf?src-supplier=Digi-Key, ComponentLink3URL=http://www.ti.com/lit/ds/symlink/sn74lv4051a-q1.pdf?src-supplier=Digi-Key, Lead Free="Lead Free", Logic Function=Multiplexer,Demultiplexer, Mount="Surface Mount", Number of Bits=8, Number of Channels=1, Number of Circuits=1, Number of Inputs=8, Number of Outputs=1, Number of Pins=16, Packaging="Tape and Reel", Pricing 1="1=0.7, 10=0.617, 25=0.5796, 100=0.4731, 250=0.43944, 500=0.374, 1000=0.2992 (USD)", Propagation Delay=7ns, Radiation Hardening=No, Stock 1=2359, Supplier 1=Digi-Key, Supply Type=Single, Turn-Off Delay Time=20ns, Turn-On Delay Time=20ns, Weight=0.014829oz
U3: library part IC_NVT2010PW, "NVT2010PW/TSSOP24/REEL13//", Case/Package=TSSOP, Manufacturer="NXP Semiconductors", Max Operating Temperature=85°C, Max Supply Voltage=5.5V, Min Operating Temperature=-40°C, Min Supply Voltage=1V, Package Quantity=1, Supplier Part Number 1=568-5299-1-ND, Category="Interface ICs", ComponentLink1Description=https://datasheet.ciiva.com/1899/nvt2008-nvt2010-1899186.pdf?src-supplier=Digi-Key, ComponentLink1URL=https://datasheet.ciiva.com/1899/nvt2008-nvt2010-1899186.pdf?src-supplier=Digi-Key, ComponentLink2Description=https://datasheet.ciiva.com/1899/nvt2008-nvt2010-1899187.pdf?src-supplier=Digi-Key, ComponentLink2URL=https://datasheet.ciiva.com/1899/nvt2008-nvt2010-1899187.pdf?src-supplier=Digi-Key, ComponentLink3Description=https://datasheet.ciiva.com/8244/nvt2008-nvt2010-8244294.pdf?src-supplier=Avnet, ComponentLink3URL=https://datasheet.ciiva.com/8244/nvt2008-nvt2010-8244294.pdf?src-supplier=Avnet, ComponentLink4Description=https://datasheet.ciiva.com/1899/nvt2008-nvt2010-1899185.pdf?src-supplier=Digi-Key, ComponentLink4URL=https://datasheet.ciiva.com/1899/nvt2008-nvt2010-1899185.pdf?src-supplier=Digi-Key, Lead Free="Lead Free", Logic Function=Translator, Manufacturer Part Number=NVT2010PW,118, Mount="Surface Mount", Number of Bits=10, Number of Channels=10, Number of Pins=24, Output Type=Voltage, Packaging="Tape and Reel", Pricing 1="1=1.02000, 10=0.91600, 25=0.86920, 100=0.83480 (USD)", Propagation Delay=1.5ns, Radiation Hardening=No, RoHS=Yes, RoHS Compliant=Yes, Series=-, Stock 1=3117, Supplier 1=Digi-Key, Turn-On Delay Time=1.5ns
U5: library part IC_ADS1115, "TEXAS INSTRUMENTS - ADS1115IDGSR . - Analogue to Digital Converter, 16 bit, 860 SPS, Differential, Single Ended, I2C, Single, 2 V", Case/Package=VSSOP, Manufacturer="Texas Instruments", Max Operating Temperature=125°C, Max Supply Voltage=5.5V, Min Operating Temperature=-40°C, Min Supply Voltage=2V, Package Quantity=2500, Power Dissipation=900uW, Supplier Part Number 1=296-38849-1-ND, Category="Analog to Digital Converters (ADCs)", ComponentLink1Description=https://datasheet.ciiva.com/4031/47725463s8438921n7713-4031028.pdf?src-supplier=Arrow+Electronics, ComponentLink1URL=https://datasheet.ciiva.com/4031/47725463s8438921n7713-4031028.pdf?src-supplier=Arrow+Electronics, ComponentLink2Description=https://datasheet.ciiva.com/1304/ads1113-1304266.pdf?src-supplier=Digi-Key, ComponentLink2URL=https://datasheet.ciiva.com/1304/ads1113-1304266.pdf?src-supplier=Digi-Key, ComponentLink3Description=https://datasheet.ciiva.com/25993/sbas444b-25993205.pdf?src-supplier=Avnet+Europe, ComponentLink3URL=https://datasheet.ciiva.com/25993/sbas444b-25993205.pdf?src-supplier=Avnet+Europe, Contact Plating=Gold, Conversion Rate=0.86KS/s, Integral Nonlinearity (INL)=1LSB, Interface=I2C, Lead Free="Lead Free", Manufacturer Part Number=ADS1115IDGSR, Max Supply Voltage (DC)=5.5V, Min Supply Voltage (DC)=2V, Number of A/D Converters=1, Number of Bits=16, Number of Converters=1, Number of Inputs=4, Number of Pins=10, Packaging="Tape and Reel", Polarity=Bipolar, Pricing 1="1=5.62000, 10=5.04600, 25=4.77000, 100=3.92200, 250=3.51920, 500=3.39200, 1000=2.81960 (USD)", Radiation Hardening=No, REACH SVHC="No SVHC", Resolution=16b, RoHS=Yes, RoHS Compliant=Yes, Sampling Rate=860S/s, Series=-, Stock 1=7435, Supplier 1=Digi-Key, Supply Type=Single

## Via types
v1: diameter 29.53, hole 17.72, Top Layer to Bottom Layer, tented both sides, 105 vias

## Nets (pads, with @x,y where several pads share a name; then routed paths per layer and width w, separated by ;. In a path a pad name is that pad's centre, name@x,y a point inside that pad or via, vN(x,y) a via of type N, cw(c..) or ccw(c..) an arc to the next point about the centre after c; other vN are vias at no path point)
D+3.3V: C3.2 JP1.1 R2.2 R3.2 R4.2 U1.3 U3.2 | length 1841
  Top Layer w6: R3.2@812,3502 R3.2
  Top Layer w10: v1(769,3399.63) R4.2 ; v1(769,3502) R3.2@812,3502 ; U3.2 v1(1076.18,3425.39) ; U1.3@1177.15,3984.24 1254.76,3984.24 1272.98,3966.02 R2.2
  Top Layer w16: v1(1076.18,3425.39) 1076.18,3558.32 925.2,3709.3 JP1.1 1158.53,3779.53 1177.15,3798.15 C3.2@1177.15,3906.88
  Top Layer w22: C3.2@1177.15,3906.88 1177.15,3984.24 U1.3@1177.15,4226.37
  Bottom Layer w6: v1(769,3399.63) v1@769.63,3399
  Bottom Layer w10: v1(769,3399.63) v1(769,3502) ; v1@769.63,3399 940,3399 966.39,3425.39 v1(1076.18,3425.39)
D+5V: C1.2 C2.2 C4.2 C6.2 C7.2 J1.2 J2.2 J4.2 J5.9 J5.10 J5.11 J5.12 J5.13 J5.14 J5.15 J5.16 J6.5 J6.6 J6.7 J6.8 JP2.1 R1.1 R10.2 R13.2 R14.1 R15.1 R16.1 R17.1 R18.1 R19.1 R20.1 R21.1 U1.1 U2.16 U4.16 U5.8 | length 6814.9
  Top Layer w6: J6.8 J6.8@516.93,2311.02 ; C4.2@689.8,2310.28 C4.2 ; C7.2 C7.2@1038.5,1510.03 ; C7.2@1036.51,1513 1059.93,1536.42 U5.8 ; C2.2@1086.6,4303.87 C2.2 ; C6.2@1095.24,2310.63 C6.2@1096.22,2309.65
  Top Layer w10: v1(643.76,2311.47) C4.2
  Top Layer w16: U2.16 C4.2@689.8,2310.28 ; v1(818.9,2838.58) R17.1 ; v1(897.64,2838.58) R18.1 ; v1(976.38,2838.58) R19.1 ; v1(1038.5,1461) C7.2@1038.5,1510.03 ; v1(1049.74,2310.63) C6.2@1095.24,2310.63 ; v1(1055.12,2838.58) R20.1 ; v1(1086.6,4166.37) U1.1 ; C6.2@1096.22,2309.65 1125.63,2280.24 U4.16 v1(1125.63,2172.68) ; v1(1133.86,2838.58) R21.1 ; v1(1212.6,2838.58) R16.1 ; R10.2 v1(1300.91,3572.83) ; v1(1291.34,2838.58) R15.1 ; R1.1 v1(1348.5,4068.94) ; v1(1370.08,2838.58) R14.1 ; v1(1448.82,2838.58) R13.2
  Top Layer w22: 184.25,1734.47 184.25,1517.32 128.35,1461.42 128.35,1100.79 424.02,805.12 531.1,805.12 531.5,804.72 531.5,724.41 440.94,633.86 440.94,456.69 466.54,431.1 J1.2
  Top Layer w32: J2.2 776.77,4112.77 890.37,4226.37 U1.1 C2.2@1086.6,4303.87
  Bottom Layer w16: v1(224.41,2838.58) v1(818.9,2838.58) v1(897.64,2838.58) v1(976.38,2838.58) v1(1055.12,2838.58) v1(1133.86,2838.58) v1(1212.6,2838.58) v1(1291.34,2838.58) v1(1370.08,2838.58) v1(1448.82,2838.58) ; J6.8 516.93,2311.02 602.76,2311.02 ; 602.76,2310.63 v1(1049.74,2310.63) ; v1(1038.5,1461) 1222,1461 1275,1514 1275,1941 1125.63,2090.37 v1(1125.63,2172.68) ; v1(1086.6,4166.37) 1251.06,4166.37 v1(1348.5,4068.94) 1348.5,3620.43 v1(1300.91,3572.83)
GND: C1.1 C2.1 C3.1 C4.1 C5.1 C6.1 C7.1 D1.2 D2.2 J1.1 J2.1 J4.1 J5.5 J5.6 J5.7 J5.8 J5.17 J5.18 J5.19 J5.20 J6.3 J6.4 J6.9 J6.10 JP5.1 JP13.1 MH1.1 MH2.1 MH3.1 MH4.1 U1.2 U2.6 U2.7 U2.8 U3.1 U4.6 U4.7 U4.8 U5.1 U5.2 U5.3 U5.5 U5.7 | length 1002.4
  Top Layer w6: C4.1 692,2371.53 v1(692,2417) ; v1(972.13,1756.19) 1020.17,1756.19 U5.5 ; U3.1@1023.62,3457.48 U3.1 ; C6.1@1095.91,2370 C6.1
  Top Layer w10: U5.3 U5.2 U5.1 v1(1147.33,1756.58)
  Top Layer w16: C1.1 860.21,3884.18 v1(907.45,3884.18) ; U2.6 U2.7 ; v1(976.47,1463) C7.1 ; v1(989.8,1919.05) U2.7 ; U3.1@1023.62,3457.48 v1(1023.62,3500) ; U2.8 U2.7 ; v1(1049,2370) C6.1@1095.91,2370 ; C2.1 1146.83,4303.48 v1(1194.47,4303.48) ; v1(1149.61,3570.87) 1195.87,3570.87 C5.1 ; C3.1 1236.99,3906.09 v1(1284.63,3906.09) ; U1.2 v1(1337.7,4226.37) ; U4.6 U4.7 ; v1(1425.63,1793.66) U4.7 ; U4.8 U4.7 ; D2.2 1527.83,3964.45 v1(1567.59,3964.45) ; D1.2 1528.22,4024.33 v1(1571.53,4024.33)
  other v1: 377.95,181.1 574.8,181.1 771.65,181.1 968.5,181.1 1165.35,181.1 279.53,377.95 476.38,377.95 870.08,377.95 1066.93,377.95 1263.78,377.95 1460.63,377.95 649.5,499 377.95,574.8 968.5,574.8 1165.35,574.8 1362.2,574.8 279.53,771.65 1066.93,771.65 1263.78,771.65 1460.63,771.65 650.5,876 181.1,968.5 377.95,968.5 1165.35,968.5 1362.2,968.5 870.08,1165.35 1460.63,1165.35 181.1,1362.2 771.65,1362.2 1165.35,1362.2 1362.2,1362.2 870.08,1559.06 1460.63,1559.06 771.65,1755.91 1362.2,1755.91 1066.93,1952.76 1460.63,1952.76 968.5,2149.61 1165.35,2149.61 1362.2,2149.61 673.23,2740.16 377.95,2937.01 1460.63,3133.86 377.95,3330.71 1165.35,3330.71 453.5,3473.5 673.23,3527.56 1460.63,3527.56 377.95,3724.41 574.8,3724.41 968.5,3724.41 1165.35,3724.41 279.53,3921.26 1066.93,3921.26 1460.63,3921.26 181.1,4118.11 377.95,4118.11 574.8,4118.11 968.5,4118.11 1362.2,4118.11 476.38,4314.96 673.23,4314.96 870.08,4314.96 1263.78,4314.96
NetC5_2: C5.2 R10.1 U3.23 U3.24 | length 146.1
  Top Layer w6: C5.2 C5.2@1197.83,3511.81 ; R10.1 R10.1@1256.5,3511.22
  Top Layer w16: C5.2@1197.83,3511.81 R10.1 ; U3.23 U3.24 R10.1@1256.5,3511.22
NetD1_1: D1.1 R1.2 | length 54.9
  Top Layer w6: D1.1@1461.68,4023.94 D1.1
  Top Layer w15.98: R1.2 D1.1@1461.68,4023.94
NetD2_1: D2.1 R2.1 | length 54.1
  Top Layer w16: R2.1 D2.1
NetJ3_1: J3.1 R5.2 | length 350
  Top Layer w6: J3.1 512.91,3725.59 621.5,3617 R5.2
NetJ3_2: J3.2 R6.2 | length 332.2
  Top Layer w6: J3.2 561.91,3625.59 627.59,3559.91 R6.2
NetJ3_5: J3.5 R7.2 | length 312
  Top Layer w6: J3.5 508.66,3326.77 614.17,3326.77 629.13,3341.73 R7.2
NetJ3_6: J3.6 R8.2 | length 330.8
  Top Layer w6: J3.6 508.66,3224.41 606.3,3224.41 666.54,3284.65 R8.2
NetJ3_7: J3.7 R9.2 | length 351.1
  Top Layer w6: J3.7 511.02,3122.05 594.49,3122.05 700.79,3228.35 812.01,3228.35 R9.2
NetJ3_8: J3.8 R11.2 | length 364.5
  Top Layer w6: J3.8 512.15,3030.26 577.5,3030.26 715.75,3168.5 R11.2
NetJ3_9: J3.9 R12.2 | length 382.4
  Top Layer w6: J3.9 514.96,2933.07 571.04,2933.07 579.96,2941.99 579.96,2942.16 590.55,2952.76 748.03,3110.24 811.61,3110.24 R12.2
RX: J1.4 JP4.1 R14.2 U3.21 | length 3441
  Top Layer w6: J1.4 1594.56,1513.46 1594.56,2358.2 1433.07,2519.69 1433.07,2642.52 JP4.1 1397.64,2783.46 1409.45,2795.28 1409.45,2933.07 1399.02,2943.5 R14.2 1370.08,2976.38 1397.64,3003.94 1397.64,3326.77 1350.2,3374.21 U3.21
RX_PI: R6.1 U3.4 | length 294.3
  Top Layer w6: R6.1 912.09,3559.91 946,3526 946,3415.5 987.29,3374.21 U3.4
SCL: J4.3 JP7.1 R15.2 U3.20 U5.10 | length 3471.1
  Top Layer w6: J4.3 777.12,805.12 1099.3,1127.3 U5.10 1395.85,1583.35 1555,1742.5 1555,2321 1271.65,2604.35 1271.65,2642.13 1307.09,2677.56 1307.09,2678.35 1307.48,2678.74 1307.48,2749.52 1251.97,2805.03 1251.97,2939.99 1255.48,2943.5 R15.2 1291.34,3000 1358.27,3066.93 1358.27,3318.9 1328.54,3348.62 U3.20
SCL_PI: J3.3 R3.1 U3.5 | length 687.8
  Top Layer w6: J3.3 551.41,3525.59 615.5,3461.5 858.5,3461.5 873.52,3476.52 R3.1 909,3502.5 919.5,3492 919.5,3412.5 983.38,3348.62 U3.5
SDA: J4.4 JP8.1 R16.2 U3.19 U5.9 | length 3374.8
  Top Layer w6: J4.4 868.91,942.91 1080,1154 1080,1582.97 U5.9 1079.61,1615.61 1093.81,1629.81 1392.31,1629.81 1531.19,1768.69 1531.19,2303.86 1251.97,2583.09 1251.97,2641.73 JP8.1 1215.75,2748.82 1208.66,2755.91 1173.23,2791.34 1173.23,2933.07 1183.66,2943.5 R16.2 1212.6,2996.06 1224.41,3007.87 1267.72,3007.87 1334.65,3074.8 1334.65,3307.09 1318.7,3323.03 U3.19
SDA_PI: J3.4 R4.1 U3.6 | length 588.8
  Top Layer w6: J3.4 596.59,3425.59 612,3441 857.5,3441 873.52,3424.98 R4.1 900.68,3399.63 977.27,3323.03 U3.6
SHOCK_1: J6.1 U4.13 | length 1232
  Top Layer w6: J6.1 421.26,2716.14 421.26,2756.69 440.16,2775.59 542.91,2775.59 584.65,2733.86 584.65,2682.35 765,2502 1121.5,2502 1275.63,2347.87 U4.13
SHOCK_2: J6.12 U4.14 | length 979
  Top Layer w6: J6.12 528.74,2711.42 767.16,2473 1107.5,2473 1225.63,2354.87 U4.14
SHOCK_3: J6.11 U4.15 | length 888.4
  Top Layer w6: J6.11 596.58,2611.42 762,2446 1086,2446 1175.63,2356.37 U4.15
SHOCK_4: J6.2 U4.12 | length 1502
  Top Layer w6: J6.2 372.83,2611.42 350.39,2633.86 350.39,2732.28 409.84,2791.73 558.66,2791.73 606.3,2744.09 606.3,2692.2 765.5,2533 1138.5,2533 1325.63,2345.87 U4.12
SHOCK_MUX: U4.3 U5.6 | length 414.6
  Top Layer w6: U5.6 1020.56,1624.3 1065.76,1669.5 1158.5,1669.5 1225.63,1736.63 U4.3
SHOCK_S0: JP11.1 R20.2 U3.15 U4.11 | length 1322.8
  Top Layer w6: U3.15 1208.86,3220.67 1196.85,3208.66 1196.85,3106.3 1137.8,3047.24 1074.8,3047.24 1055.12,3027.56 R20.2 1023.62,2944.88 1015.75,2937.01 1015.75,2783.46 1035.43,2763.78 1035.43,2676.57 JP11.1 1375.63,2337.76 U4.11
SHOCK_S0_PI: R11.1 U3.10 | length 174
  Top Layer w6: R11.1 932.28,3168.5 984.45,3220.67 U3.10
SHOCK_S1: JP12.1 R21.2 U3.14 U4.10 | length 1312
  Top Layer w6: U3.14 1300.99,3195.08 1311.02,3185.04 1311.02,3090.55 1251.97,3031.5 1161.42,3031.5 1133.86,3003.94 R21.2 1098,2944.88 1094.49,2941.37 1094.49,2783.46 1125.98,2751.97 1125.98,2668.02 1425.63,2368.37 U4.10
SHOCK_S1_PI: R12.1 U3.11 | length 187
  Top Layer w6: R12.1 906.69,3111.42 990.35,3195.08 U3.11
TEMP_1: J5.2 U2.13 | length 1272.7
  Top Layer w6: J5.2 531,1373.52 531,1941.5 681.5,2092 818,2092 839.8,2113.8 U2.13
TEMP_2: J5.3 U2.14 | length 1146.9
  Top Layer w6: J5.3 501,1422.26 501,1962.5 665,2126.5 756.5,2126.5 789.8,2159.8 U2.14
TEMP_3: J5.4 U2.15 | length 1033.7
  Top Layer w6: J5.4 470,1470 470,1982.5 640,2152.5 708,2152.5 739.8,2184.3 U2.15
TEMP_4: J5.1 U2.12 | length 1375.1
  Top Layer w6: J5.1 561.5,1325.28 561.5,1923.5 701.5,2063.5 843,2063.5 889.8,2110.3 U2.12
TEMP_5: J5.22 U2.1 | length 1431.3
  Top Layer w6: J5.22 218.5,1218.5 218.5,1107 284.32,1041.18 481.68,1041.18 689.8,1249.3 U2.1
TEMP_6: J5.24 U2.5 | length 1418.7
  Top Layer w6: J5.24 307.09,1114.17 321.08,1100.18 413.18,1100.18 594,1281 594,1911.5 636,1953.5 851.5,1953.5 889.8,1915.2 U2.5
TEMP_7: J5.21 U2.2 | length 1621.1
  Top Layer w6: J5.21 196,1274.74 196,1095.5 280,1011.5 498.5,1011.5 739.8,1252.8 U2.2
TEMP_8: J5.23 U2.4 | length 1569.1
  Top Layer w6: J5.23 305.54,1226.8 262.23,1226.8 240.16,1204.72 240.16,1122.05 292.7,1069.5 441.5,1069.5 628,1256 628,1908 640,1920 828,1920 839.8,1908.2 U2.4
TEMP_MUX: U2.3 U5.4 | length 347.1
  Top Layer w6: U2.3 789.8,1805.01 793.32,1801.5 1033.77,1801.5 1040.24,1795.03 U5.4
TEMP_S0: JP6.1 R17.2 U2.11 U3.18 | length 1539.9
  Top Layer w6: v1(825.7,2396) 825.7,2348.3 851.5,2322.5 904.11,2322.5 939.8,2286.8 U2.11 ; v1(825.7,2591) 826,2591.3 826,2615.73 JP6.1 763.78,2929.13 779.53,2944.88 R17.2 818.9,3003.94 830.71,3015.75 885.83,3015.75 988.19,3118.11 1082.68,3118.11 1125.98,3161.42 1125.98,3263.78 1159.65,3297.44 U3.18
  Bottom Layer w6: v1(825.7,2396) v1(825.7,2591)
TEMP_S0_PI: R7.1 U3.7 | length 170.7
  Top Layer w6: R7.1 918.11,3341.73 962.4,3297.44 U3.7
TEMP_S1: JP9.1 R18.2 U2.10 U3.17 | length 1377.7
  Top Layer w6: JP9.1 854.33,2673.67 902.5,2625.5 902.5,2591.6 v1(903.1,2591) ; JP9.1@858.27,2677.95 858.27,2933.07 870.08,2944.88 R18.2 897.64,2988.19 1003.94,3094.49 1098.43,3094.49 1149.61,3145.67 1149.61,3244.09 1177.36,3271.85 U3.17 ; v1(903.1,2396) 903.1,2365.9 989.8,2279.2 U2.10
  Bottom Layer w6: v1(903.1,2396) v1(903.1,2591)
TEMP_S1_PI: R8.1 U3.8 | length 157.7
  Top Layer w6: R8.1 875,3283.46 929.56,3283.46 941.17,3271.85 U3.8
TEMP_S2: JP10.1 R19.2 U2.9 U3.16 | length 1298.4
  Top Layer w6: v1(980.5,2396) 980.5,2336.5 1039.8,2277.2 U2.9 ; v1(980.5,2591) 981,2591.5 981,2641.84 JP10.1 945,2678.07 945,2755.5 937.01,2763.49 937.01,2929.13 952.76,2944.88 R19.2 976.38,3027.56 1019.68,3070.87 1118.11,3070.87 1173.23,3125.98 1173.23,3228.35 1191.14,3246.26 U3.16
  Bottom Layer w6: v1(980.5,2396) v1(980.5,2591)
TEMP_S2_PI: R9.1 U3.9 | length 160.1
  Top Layer w6: R9.1 940.16,3227.56 958.86,3246.26 U3.9
TX: J1.3 JP3.1 R13.1 U3.22 | length 3631.7
  Top Layer w6: J1.3 663.39,431.1 744.09,511.81 744.09,629.92 1617,1502.83 1617,2367.25 1452.76,2531.5 1452.33,2531.5 1452.33,2641.31 1488.19,2677.17 JP3.1 1488.19,2933.07 1477.76,2943.5 R13.1 1448.82,2972.44 1417.32,3003.94 1417.32,3338.58 1356.1,3399.8 U3.22
TX_PI: R5.1 U3.3 | length 326.7
  Top Layer w6: R5.1 912.5,3617 970,3559.5 970,3416 986.2,3399.8 U3.3
pads on no net: J1.5 J4.5 U3.12 U3.13 U4.1 U4.2 U4.4 U4.5 U4.9

## Polygon pours and split planes (outlines as drawn)
GND on Top Layer "GND_L01_P003" (solid, remove dead copper, pour order 3): 0,0 1653.54,0 1653.54,4488.19 0,4488.19
D+5V on Top Layer "D+5V_L01_P002" (solid, remove dead copper, pour order 2): 829,3999 828,3999 802.65,4024.35 760.67,4024.35 439.31,4024.35 173.35,3758.39 173.35,1735.83 173.35,1702.62 206.56,1735.83 239.76,1735.83 416.93,1735.83 432.8,1751.7 432.8,2125.98 452.76,2145.67 551.18,2145.67 570.87,2165.35 570.87,2341.98 550.91,2361.93 295.28,2361.93 275.32,2393.86 275.32,3739.89 406.03,3870.59 595.91,3870.59 600.5,3866 600.5,3759.98 640.28,3720.2 696.58,3720.2 728.07,3751.7 728.07,3818.63 770,3863.5 829,3863.5
GND on Bottom Layer "GND_L02_P004" (solid, remove dead copper, pour order 4): 0,0 1653.54,0 1653.54,4488.19 0,4488.19

## Keep-outs
Keep-Out Layer:
  the board outline again, w30

## Other copper
Top Layer:
  pour cut-out: 868.91,942.91 885.5,926.33 885.5,918
  pour cut-out: 728.35,636.22 734.65,636.22 736.61,633.07

## Silkscreen, mask and mechanical layers (free items; w line width, h text height)
Top Overlay:
  lines w10: 20.08,696.85 661.81,696.85 792.91,696.85 ; 20.08,1070.87 396.85,1070.87 ; 20.08,2094.49 396.46,2094.49 ; 20.08,2114.57 528.74,2114.57 ; 20.08,2826.38 193.7,2826.38 ; 20.47,322.83 662.2,322.83 793.31,322.83 ; 20.47,677.17 662.2,677.17 792.13,677.17 ; 20.47,1051.18 661.81,1051.18 791.73,1051.18 ; 20.47,2806.69 528.74,2806.69 ; 20.47,3825.98 535.04,3825.98 ; 257.09,2826.77 535.04,2826.77 ; 679,3937.5 679,4469 ; 980,3937.5 980,4469
  text "PDB" at 487,4285.5 h59.06
  text "5V" at 1625.8,4033.2 h34 r90
  text "+ -" at 553.2,4015.2 h34
  text "3V3" at 1628.3,3904.7 h34 r90
  text "GND" at 751.11,3684.9 h34
  text "3V3" at 885.73,3680.22 h34
  text "5V" at 629.82,3679.03 h34
  text "RASPBERRY PI" at 641.61,3027.68 h59.06 r90
  text "TX" at 1510.3,2574.28 h34 r90
  text "RX" at 1415.3,2570.72 h34 r90
  text "SCL" at 1233.8,2540.13 h34 r90
  text "SDA" at 1328.8,2537.21 h34 r90
  text "TEMP_S1" at 867.97,2435.72 h34 r90
  text "TEMP_S0" at 778.97,2421.15 h34 r90
  text "TEMP_S2" at 964.97,2421.15 h34 r90
  text "SHOCK_S1" at 1043.47,2394.77 h34 r90
  text "SHOCK_S0" at 1162.97,2380.2 h34 r90
  text "SHOCK TRAVEL" at 639.24,2155.24 h59.06 r90
  text "GND" at 852.61,1394.9 h34
  text "IMU" at 772.32,810.36 h59.06 r90
  text "GPS" at 774.28,425.32 h59.06 r90
  text "DAQ Board Rev 1" at 1277.84,421.26 h59.06 r90
  text "z" at 1542.87,405.51 h78.74 r90
  text "2" at 1450.86,405.22 h157.48 r90
Bottom Overlay:
  lines w10: 444.88,1425.2 641.73,1425.2 ; 444.88,1736.22 641.73,1736.22 ; 578.74,2358.27 775.59,2358.27 ; 578.74,2559.06 775.59,2559.06
  text "GND" at 918.8,4028.7 h34
  text "5V" at 796.45,4028.05 h34
  text "TX" at 442.62,3703.05 h34
  text "RX" at 434.74,3608.56 h34
  text "SCL" at 441.3,3508.2 h34
  text "SDA" at 446.3,3411.7 h34
  text "TEMP S0" at 446.56,3301.48 h34
  text "TEMP S1" at 446.56,3206.99 h34